# Altium PCB right_conn.PcbDoc
Units mm, origin at the board's own origin, x right, y up, seen from the top; angles counter-clockwise.
Board outline 104.93 x 135.55 mm, 4 copper layers (Top Layer, Mid-Layer 1, Mid-Layer 2, Bottom Layer), stack 1.58 mm thick; 4 components, 59 nets, 180 pads, 120 vias.
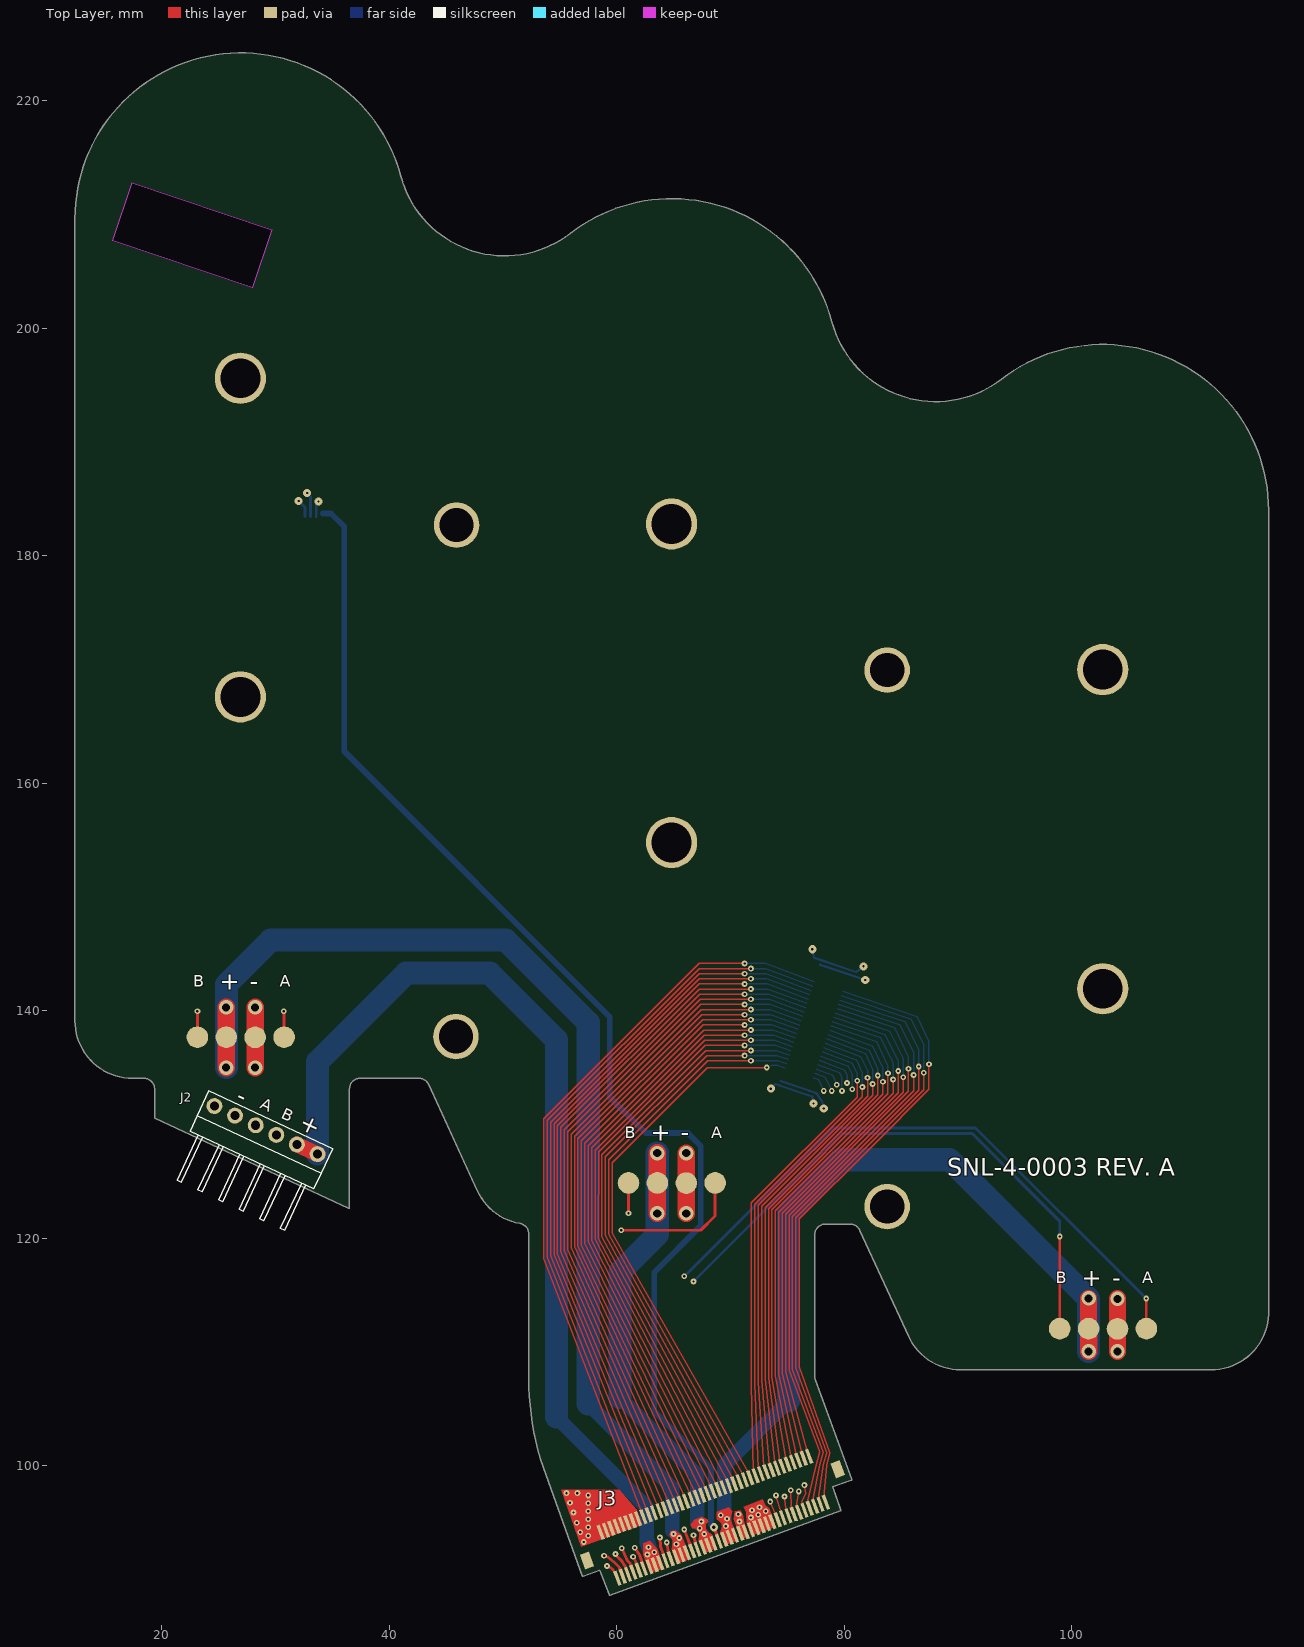
[diagram p0: Top Layer view]
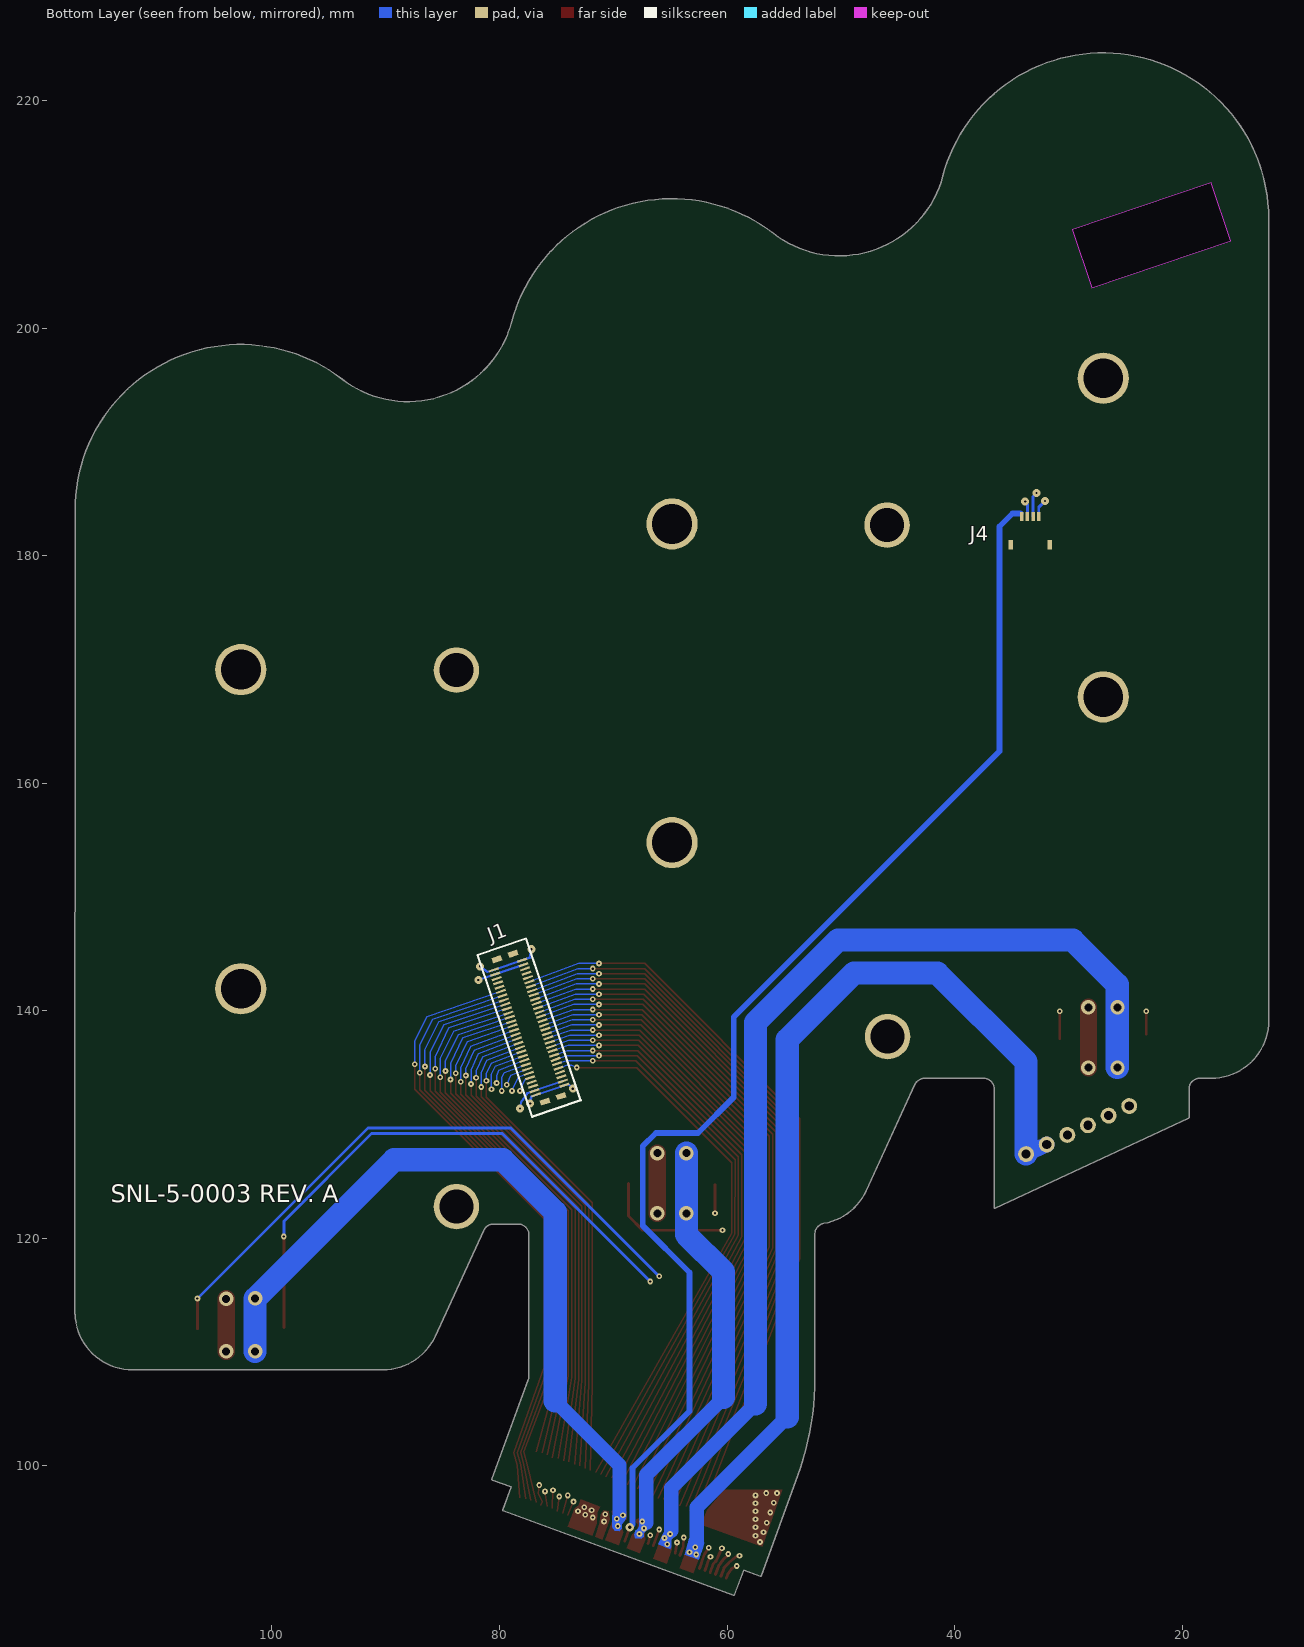
[diagram p1: Bottom Layer view, seen from below]
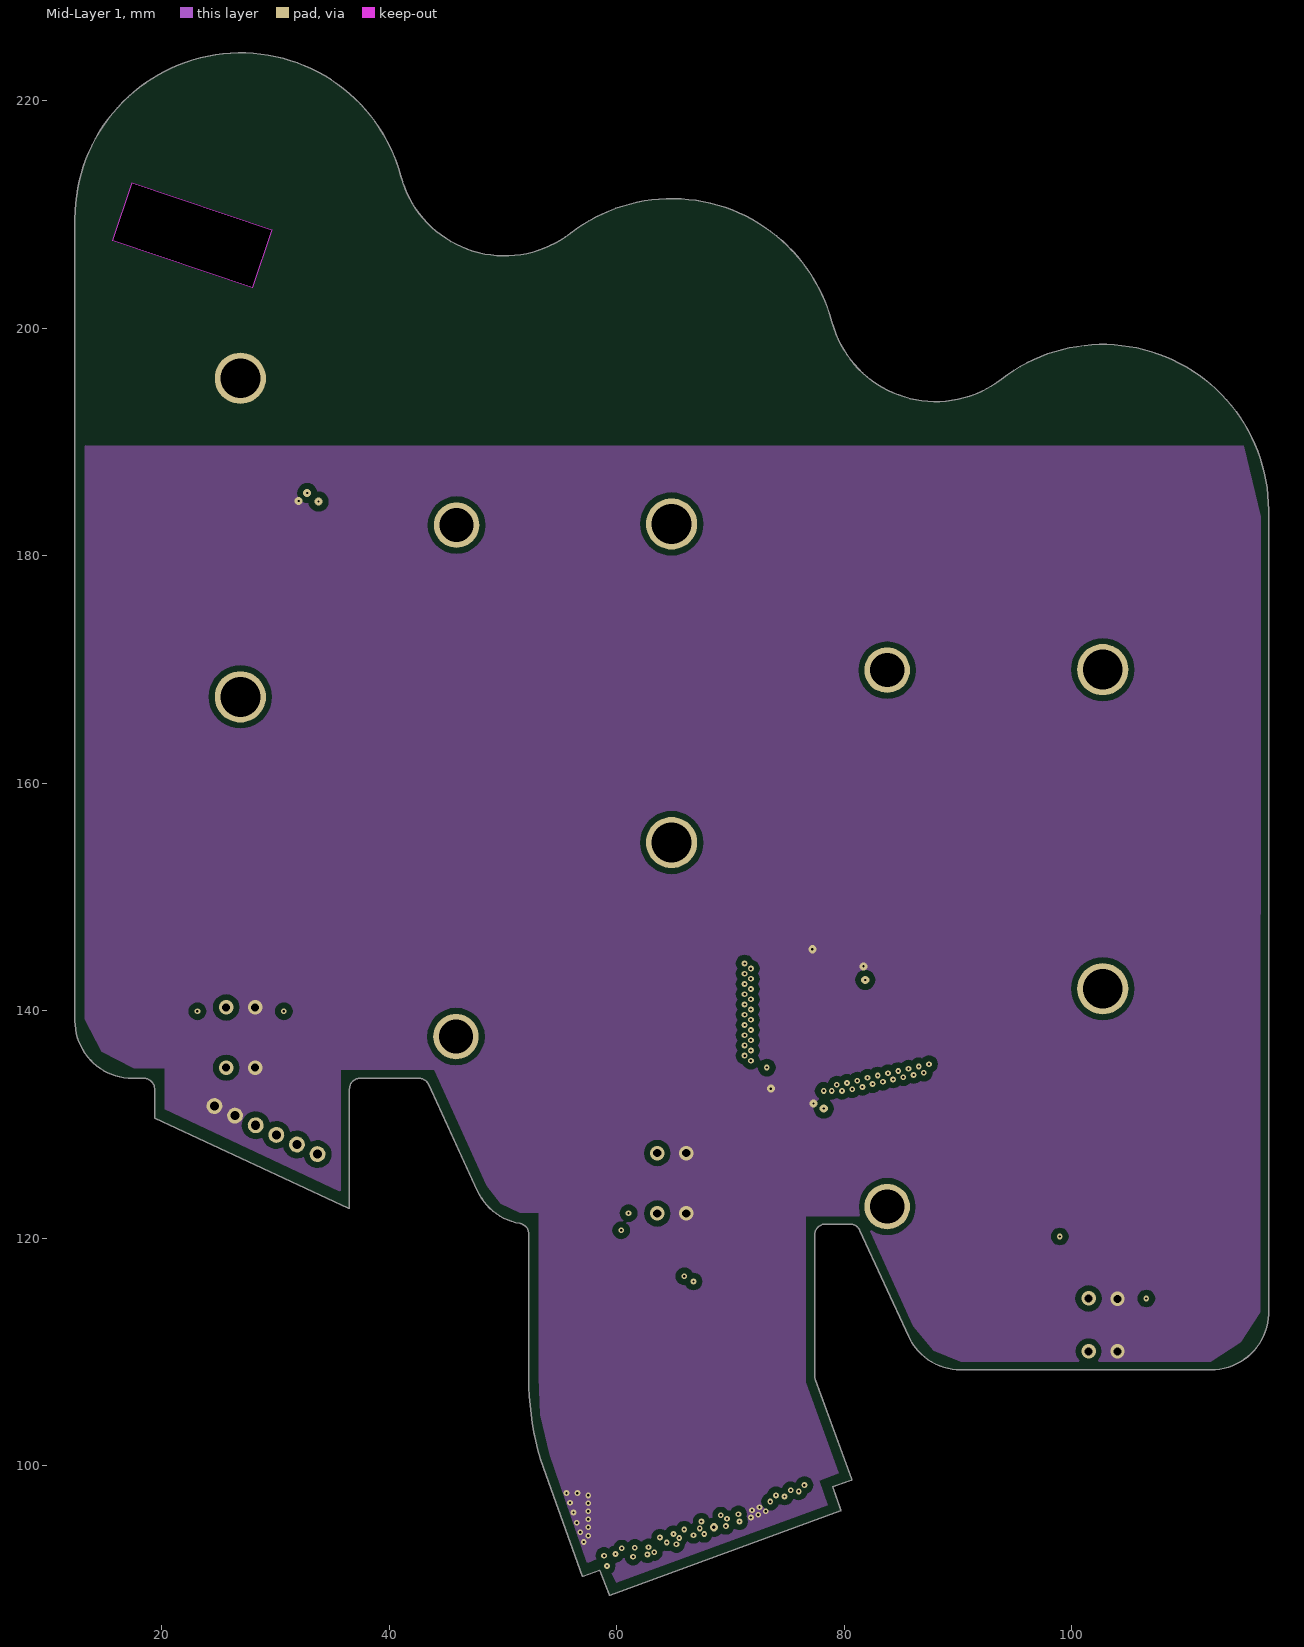
[diagram p2: Mid-Layer 1]
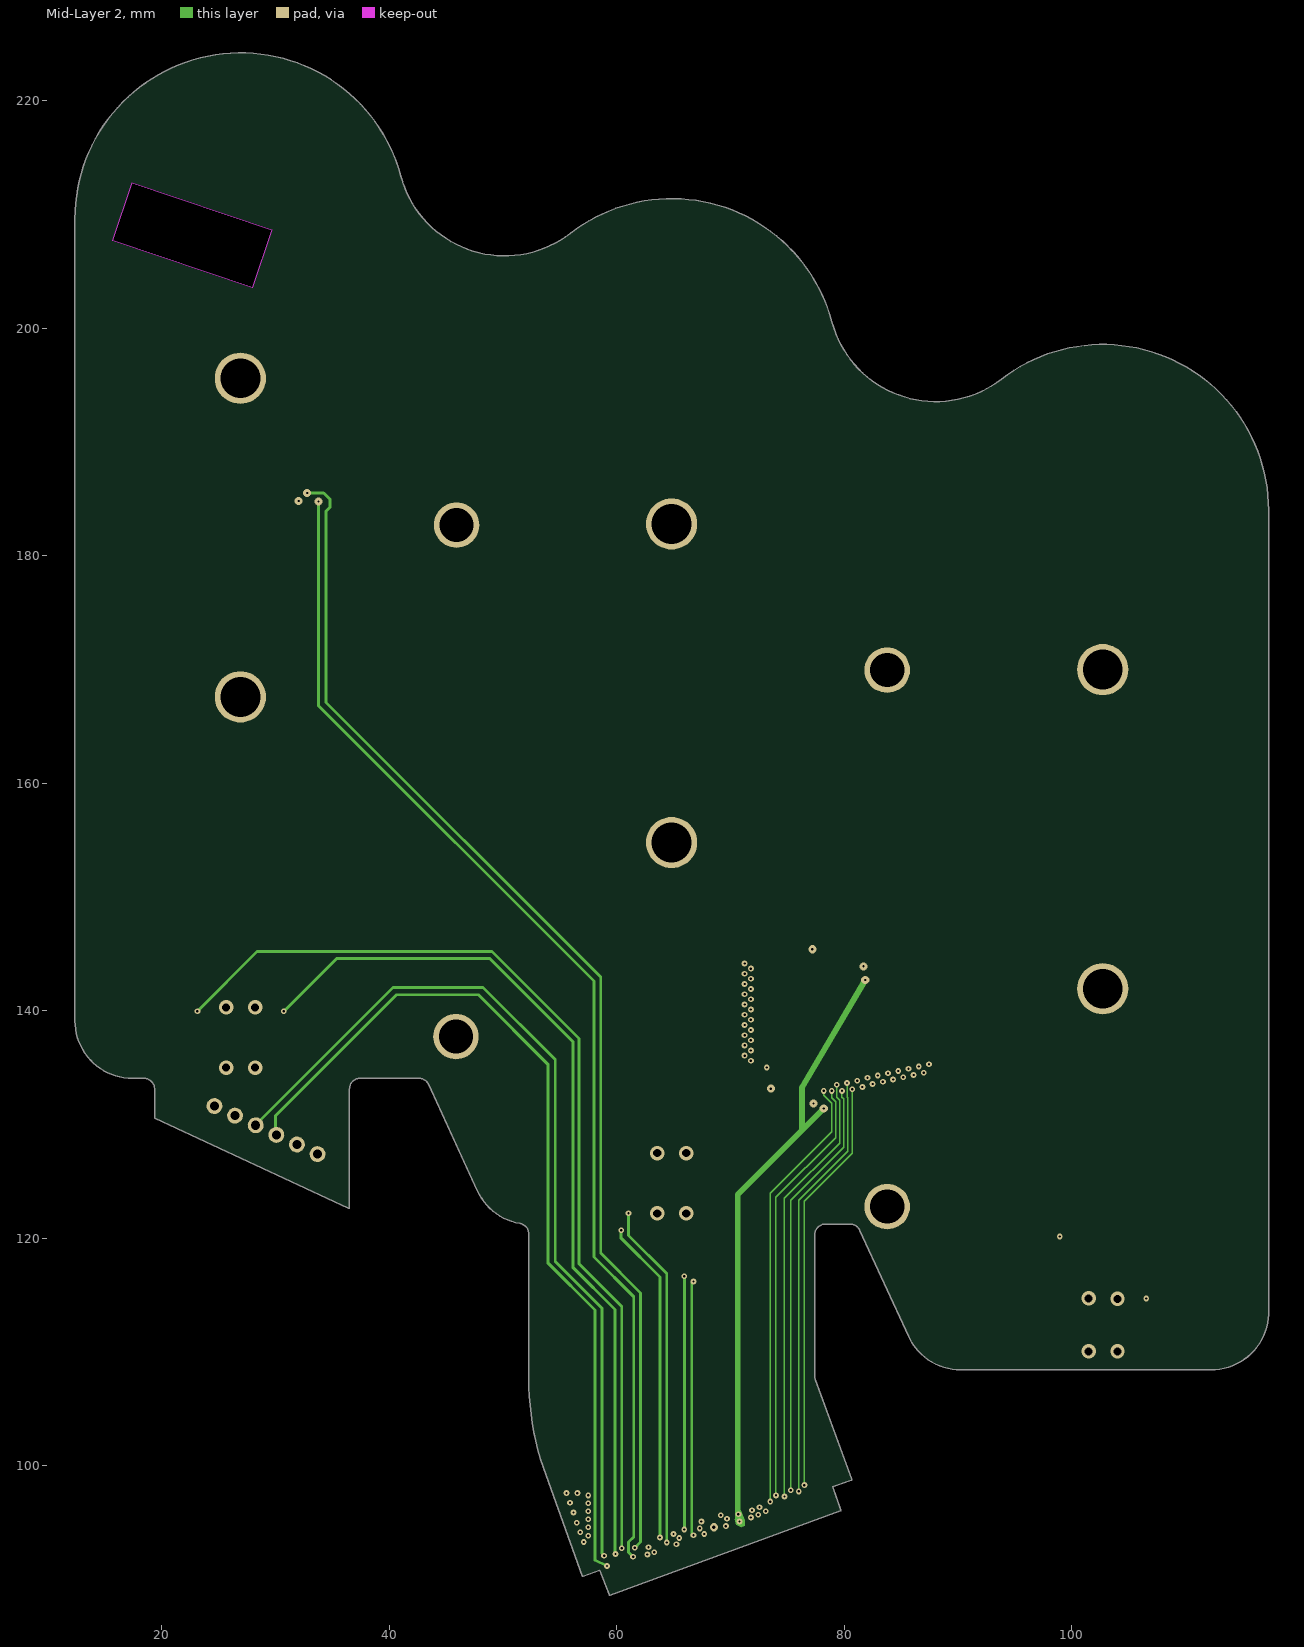
[diagram p3: Mid-Layer 2]

## Layer stack, top to bottom
Top Layer: signal copper 0.0356
Dielectric: prepreg 0.2286, FR-4, Dk 4.8
Mid-Layer 1: signal copper 0.0178
Dielectric: core 1.016, FR-4, Dk 4.8
Mid-Layer 2: signal copper 0.0178
Dielectric: prepreg 0.2286, FR-4, Dk 4.8
Bottom Layer: signal copper 0.0356

## Board outline
19.427,130.562 cw(c19.454,130.62) 19.39,130.62 19.39,133.12 ccw(c18.454,133.12) 18.454,134.056 cw(c18.454,134.12) 18.454,134.056 17.44,134.056 cw(c17.44,134.12) 17.439,134.056 cw(c17.45,139.12) 12.386,139.12 cw(c12.45,139.12) 12.386,139.12 12.39,209.62 cw(c26.954,209.62) 41.03,213.358 ccw(c50.15,215.781) 41.03,213.358 ccw(c50.15,215.781) 55.928,208.321 cw(c64.846,196.807) 78.922,200.546 ccw(c88.042,202.968) 93.82,195.508 ccw(c88.042,202.968) 93.82,195.508 cw(c102.739,183.994) 117.303,183.994 117.314,113.37 cw(c117.25,113.37) 117.314,113.37 cw(c117.25,113.37) 117.301,113.332 cw(c112.24,113.49) 112.24,108.426 90.26,108.426 cw(c90.26,113.49) 85.659,111.374 cw(c85.717,111.401) 85.659,111.374 81.377,120.698 cw(c81.434,120.725) 81.376,120.698 ccw(c80.526,120.307) 81.376,120.698 ccw(c80.526,120.307) 80.526,121.243 78.346,121.243 ccw(c78.346,120.307) 77.41,120.307 77.41,107.892 ccw(c78.346,107.892) 77.467,107.571 80.66,98.822 cw(c80.6,98.8) 80.664,98.8 cw(c80.6,98.8) 80.621,98.74 78.982,98.161 79.71,96.121 cw(c79.65,96.1) 79.714,96.1 cw(c79.65,96.1) 79.672,96.04 59.422,88.64 cw(c59.4,88.7) 59.34,88.677 58.513,90.818 57.072,90.29 cw(c57.05,90.35) 56.99,90.328 53.794,99.143 cw(c77.346,107.715) 52.282,107.715 cw(c77.346,107.715) 52.282,107.715 52.278,120.375 cw(c52.342,120.375) 52.278,120.375 ccw(c51.342,120.375) 51.502,121.298 cw(c52.367,126.287) 47.766,124.171 cw(c47.824,124.198) 47.766,124.172 47.766,124.171 47.766,124.172 43.484,133.51 cw(c43.542,133.537) 43.484,133.511 ccw(c42.634,133.12) 43.484,133.511 cw(c43.542,133.537) 43.484,133.511 ccw(c42.634,133.12) 42.634,134.056 37.454,134.056 ccw(c37.454,133.12) 36.518,133.12 36.518,122.692 cw(c36.454,122.692) 36.427,122.634
cut-out: 27.963,203.555 15.724,207.693 17.438,212.763 29.677,208.624

## Design rules (kind name [scope] priority, off if disabled: settings)
Clearance Clearance_2 [InNamedPolygon('gnd')] p1: gap=0.508
Clearance [All] p2: gap=0.127
HoleSize [All] p1: absolutevalues=TRUE maxlimit=3.81 minlimit=0.025 maxpercent=80.000 minpercent=20.000
MinimumSolderMaskSliver [All] p1: minsoldermaskwidth=0.025
PlaneConnect [All] p1: planeconnectstyle=Direct reliefexpansion=0.508 reliefentries=4 reliefconductorwidth=0.254 reliefairgap=0.254
PolygonConnect [All] p1: connectstyle=Direct reliefconductorwidth=0.254 reliefentries=4 polygonreliefangle="90 Angle" airgapwidth=0.254
RoutingVias [All] p1: holewidth=0.203 width=0.508 viastyle="Through Hole" minholewidth=0.203 minwidth=0.508 maxholewidth=0.711 maxwidth=1.27
SilkToSilkClearance [All] p1: silktosilkclearance=0.025
SilkscreenOverComponentPads [All] p1: minsilkscreentomaskgap=0.025
SolderMaskExpansion [All] p1: expansion=0.102
Width [All] p1: maxlimit=2.54 minlimit=0.127 preferedwidth=0.127
23 further rules are at their usual default settings.

## Classes and differential pairs
component class palm_connector: J4
component class camera_connector: J1
component class thumb_connector: J2
component class mobo_connector: J3

## Components (designator, comment, footprint, x,y, rotation, side; value= is the part's Value field where it differs from the comment)
J1 "Header 30X2" MOLEX_55909_0674_PLUG_60 77.4,138.51 r161.32 bottom locked
J2 "Header 6" 3M_951106_7622_AR 24.65,131.62 r335 top
J3 "header_40x2" JST-80PS-JMDSS-G-1-TF 59.25,92.35 r110 top
J4 "FH19C-4S-0.5SH(05)" FH19C-4S-0.5SH(05) 34.1,183.45 r180 bottom

## Footprints (in the part's own frame and the unit in brackets; to place one, negate y for a bottom-side part, rotate by r counter-clockwise, add the part's x,y. Pads: shape width x height; smd on the part's side, far side on the other; paste and mask are expansions set on the pad)
3M_951106_7622_AR [mm]
  round 1.4 hole 0.8: 1(0,0) 2(2,0) 3(4,0) 4(6,0) 5(8,0) 6(10,0)
  silkscreen extent -1,-7.3 11,1, body extent -1,-7.27 11,0.27, height 2
FH19C-4S-0.5SH(05) [mm]
  rect 0.3x0.8 smd: 1(0,0) 2(0.5,0) 3(1,0) 4(1.5,0)
  rect 0.4x0.8 smd: MNT(-0.95,-2.5) MNT(2.45,-2.5)
  body extent -1.25,-3.3 2.75,0.2, height 0.9
JST-80PS-JMDSS-G-1-TF [mm]
  rect 1.35x0.3 smd: 1(-2.375,0) 2(1.925,0) 3(-2.375,-0.5) 4(1.925,-0.5) 5(-2.375,-1) 6(1.925,-1) 7(-2.375,-1.5) 8(1.925,-1.5) 9(-2.375,-2) 10(1.925,-2) 11(-2.375,-2.5) 12(1.925,-2.5) 13(-2.375,-3) 14(1.925,-3) 15(-2.375,-3.5) 16(1.925,-3.5) 17(-2.375,-4) 18(1.925,-4) 19(-2.375,-4.5) 20(1.925,-4.5) 21(-2.375,-5) 22(1.925,-5) 23(-2.375,-5.5) 24(1.925,-5.5) 25(-2.375,-6) 26(1.925,-6) 27(-2.375,-6.5) 28(1.925,-6.5) 29(-2.375,-7) 30(1.925,-7) 31(-2.375,-7.5) 32(1.925,-7.5) 33(-2.375,-8) 34(1.925,-8) 35(-2.375,-8.5) 36(1.925,-8.5) 37(-2.375,-9) 38(1.925,-9) 39(-2.375,-9.5) 40(1.925,-9.5) 41(-2.375,-10) 42(1.925,-10) 43(-2.375,-10.5) 44(1.925,-10.5) 45(-2.375,-11) 46(1.925,-11) 47(-2.375,-11.5) 48(1.925,-11.5) 49(-2.375,-12) 50(1.925,-12) 51(-2.375,-12.5) 52(1.925,-12.5) 53(-2.375,-13) 54(1.925,-13) 55(-2.375,-13.5) 56(1.925,-13.5) 57(-2.375,-14) 58(1.925,-14) 59(-2.375,-14.5) 60(1.925,-14.5) 61(-2.375,-15) 62(1.925,-15) 63(-2.375,-15.5) 64(1.925,-15.5) 65(-2.375,-16) 66(1.925,-16) 67(-2.375,-16.5) 68(1.925,-16.5) 69(-2.375,-17) 70(1.925,-17) 71(-2.375,-17.5) 72(1.925,-17.5) 73(-2.375,-18) 74(1.925,-18) 75(-2.375,-18.5) 76(1.925,-18.5) 77(-2.375,-19) 78(1.925,-19) 79(-2.375,-19.5) 80(1.925,-19.5)
  rect 1.4x0.85 smd: MNT(0,-21.475) MNT(0,1.975)
  body extent -2.8,-21.8 2.35,2.3, height 4.79
MOLEX_55909_0674_PLUG_60 [mm]
  rect 0.9x0.22 smd: 1(-1.315,5.8) 2(1.315,5.8) 3(-1.315,5.4) 4(1.315,5.4) 5(-1.315,5) 6(1.315,5) 7(-1.315,4.6) 8(1.315,4.6) 9(-1.315,4.2) 10(1.315,4.2) 11(-1.315,3.8) 12(1.315,3.8) 13(-1.315,3.4) 14(1.315,3.4) 15(-1.315,3) 16(1.315,3) 17(-1.315,2.6) 18(1.315,2.6) 19(-1.315,2.2) 20(1.315,2.2) 21(-1.315,1.8) 22(1.315,1.8) 23(-1.315,1.4) 24(1.315,1.4) 25(-1.315,1) 26(1.315,1) 27(-1.315,0.6) 28(1.315,0.6) 29(-1.315,0.2) 30(1.315,0.2) 31(-1.315,-0.2) 32(1.315,-0.2) 33(-1.315,-0.6) 34(1.315,-0.6) 35(-1.315,-1) 36(1.315,-1) 37(-1.315,-1.4) 38(1.315,-1.4) 39(-1.315,-1.8) 40(1.315,-1.8) 41(-1.315,-2.2) 42(1.315,-2.2) 43(-1.315,-2.6) 44(1.315,-2.6) 45(-1.315,-3) 46(1.315,-3) 47(-1.315,-3.4) 48(1.315,-3.4) 49(-1.315,-3.8) 50(1.315,-3.8) 51(-1.315,-4.2) 52(1.315,-4.2) 53(-1.315,-4.6) 54(1.315,-4.6) 55(-1.315,-5) 56(1.315,-5) 57(-1.315,-5.4) 58(1.315,-5.4) 59(-1.315,-5.8) 60(1.315,-5.8)
  rect 0.85x0.5 smd: MNT(-0.75,6.6) MNT(-0.75,-6.6) MNT(0.75,-6.6) MNT(0.75,6.6)
  silkscreen extent -2.25,-7.5 2.25,7.5, body extent -1.56,-7 1.57,7, height 1.17

## Part data
J1: "Header, 30-Pin, Dual row"
J2: "Header, 6-Pin"
J4: library part "Header 4", "Header, 4-Pin"

## Free pads (board coordinates)
  round 1.9 smd paste-10: F0_A(30.77,137.67) F0_B(23.15,137.67) F0_POWER(25.69,137.67) F1_A(68.66,124.86) F1_B(61.04,124.86) F1_POWER(63.58,124.86) F2_A(106.56,112.05) F2_B(98.94,112.05) F2_POWER(101.48,112.05) GND(28.23,137.66) GND(66.12,124.85) GND(104.02,112.04)
  round 4.5 hole 3.5: MNT(26.93,167.58) MNT(26.93,195.58) MNT(64.83,154.78) MNT(64.83,182.78) MNT(102.73,141.93) MNT(102.73,169.98)
  round 4 hole 3: MNT(45.88,137.73) MNT(45.93,182.68) MNT(83.78,122.78) MNT(83.78,169.93)

## Via types
v1: diameter 0.508, hole 0.203, Top Layer to Bottom Layer, tented both sides, 98 vias
v2: diameter 1.27, hole 0.711, Top Layer to Bottom Layer, tented both sides, 12 vias
v3: diameter 0.711, hole 0.203, Top Layer to Bottom Layer, tented both sides, 9 vias
v4: diameter 0.711, hole 0.305, Top Layer to Bottom Layer, tented both sides, 1 vias

## Nets (pads, with @x,y where several pads share a name; then routed paths per layer and width w, separated by ;. In a path a pad name is that pad's centre, name@x,y a point inside that pad or via, vN(x,y) a via of type N, cw(c..) or ccw(c..) an arc to the next point about the centre after c; other vN are vias at no path point)
9V: J3.39 J4.1 | length 110.6
  Top Layer w0.254: v4(68.55,94.6) J3.39
  Bottom Layer w0.508: J4.1@34.2,183.7 34.9,183.7 36.05,182.55 36.05,162.8 59.4,139.45 59.4,132.4 62.55,129.25 66.25,129.25 67.4,128.1 67.4,121.1 63.3,117 63.3,104.8 68.3,99.8 68.3,94.85 v4(68.55,94.6)
CAM_D0_0: J1.18 J3.24 | length 63.4
  Top Layer w0.127: J3.24@63.6,96.45 54.5,118.55 54.5,130.05 67.25,142.8 v1(71.8,142.8)
  Bottom Layer w0.127: v1(71.8,142.8) 73.2,142.8 J1.18
CAM_D0_1: J1.15 J3.75 | length 53.6
  Top Layer w0.127: J3.75@77.25,96.95 77.85,100.1 78.15,101.2 75.45,108.5 75.45,121.9 82.3,128.75 86.55,133 v1(86.55,135.1)
  Bottom Layer w0.127: J1.15 85.35,139.05 86.55,136.55 v1(86.55,135.1)
CAM_D1_0: J1.22 J3.28 | length 61.7
  Top Layer w0.127: J3.28@64.55,96.85 55.1,118.8 55.1,129.75 67.25,141.9 v1(71.8,141.9)
  Bottom Layer w0.127: v1(71.8,141.9) 73.3,141.9 J1.22
CAM_D1_1: J1.23 J3.76 | length 46.5
  Top Layer w0.127: J3.76@75.8,100.95 74.25,108.05 74.25,122.3 84.75,132.8 v1(84.75,134.7)
  Bottom Layer w0.127: J1.23 83.6,137.9 84.75,135.55 v1(84.75,134.7)
CAM_D2_0: J1.16 J3.22 | length 64.5
  Top Layer w0.127: J3.22@63.25,96.05 54.2,118.45 54.2,130.2 67.25,143.25 v1(71.25,143.25)
  Bottom Layer w0.127: v1(71.25,143.25) 73.15,143.25 J1.16
CAM_D2_1: J1.17 J3.73 | length 53.1
  Top Layer w0.127: J3.73@76.75,96.8 77.55,100.1 77.85,101.25 75.15,108.4 75.15,122 86.1,132.95 v1(86.1,134.35)
  Bottom Layer w0.127: J1.17 84.878,138.773 86.1,136.35 v1(86.1,134.35)
CAM_D3_0: J1.14 J3.20 | length 65.4
  Top Layer w0.127: J3.20@62.8,95.8 53.9,118.35 53.9,130.35 67.25,143.7 v1(71.8,143.7)
  Bottom Layer w0.127: v1(71.8,143.7) 73.1,143.7 J1.14
CAM_D3_1: J1.19 J3.80 | length 47.5
  Top Layer w0.127: J3.80@76.75,101.25 74.85,108.25 74.85,122.1 85.65,132.9 v1(85.65,134.9)
  Bottom Layer w0.127: J1.19@79.45,140.15 84.45,138.5 85.65,135.95 v1(85.65,134.9)
CAM_D4_0: J1.28 J3.34 | length 59.4
  Top Layer w0.127: J3.34@66.05,97.15 56,119.15 56,129.15 67.4,140.55 v1(71.25,140.55)
  Bottom Layer w0.127: v1(71.25,140.55) 73.45,140.55 J1.28
CAM_D4_1: J1.21 J3.78 | length 47
  Top Layer w0.127: J3.78@76.25,101.15 74.55,108.15 74.55,122.2 85.2,132.85 v1(85.2,134.15)
  Bottom Layer w0.127: J1.21 84.004,138.196 85.2,135.8 v1(85.2,134.15)
CAM_D5_0: J1.24 J3.30 | length 61
  Top Layer w0.127: J3.30@65.05,96.95 55.4,118.9 55.4,129.55 67.3,141.45 v1(71.25,141.45)
  Bottom Layer w0.127: v1(71.25,141.45) 73.35,141.45 J1.24
CAM_D5_1: J1.43 J3.69 | length 42.7
  Top Layer w0.127: J3.69@75.8,96.45 v1(76,97.75)
  Mid-Layer 2 w0.127: v1(76,97.75) 76,123.35 80.3,127.65 80.3,132.35 80.25,132.4 v1(80.25,133.65)
  Bottom Layer w0.127: J1.43 80.046,134.761 80.25,134.3 v1(80.25,133.65) v1@80.25,133.5
CAM_D6_0: J1.38 J3.44 | length 55.1
  Top Layer w0.127: J3.44@68.3,98.15 57.5,119.7 57.5,128.15 67.65,138.3 v1(71.8,138.3)
  Bottom Layer w0.127: v1(71.8,138.3) 73.75,138.3 J1.38
CAM_D6_1: J1.45 J3.67 | length 42.4
  Top Layer w0.127: v1(75.3,97.85) J3.67@75.35,96.25
  Mid-Layer 2 w0.127: v1(75.3,97.85) 75.3,123.35 79.95,128 79.95,132.25 79.8,132.4 v1(79.8,132.95)
  Bottom Layer w0.127: J1.45 79.6,134.55 79.8,134.15 v1@79.797,132.953
CAM_D7_0: J1.40 J3.46 | length 54.2
  Top Layer w0.127: J3.46@68.75,98.35 57.8,119.8 57.8,127.95 67.7,137.85 v1(71.25,137.85)
  Bottom Layer w0.127: v1(71.25,137.85) 73.8,137.85 J1.40
CAM_D7_1: J1.51 J3.61 | length 41.5
  Top Layer w0.127: v1(73.5,96.85) J3.61@74,95.65
  Mid-Layer 2 w0.127: v1(73.5,96.85) 73.5,123.95 78.9,129.35 78.9,131.85 78.2,132.55 v1(78.2,132.95)
  Bottom Layer w0.127: J1.51 77.761,133.933 v1(78.2,132.95)
CAM_D8_0: J1.44 J3.50 | length 52.6
  Top Layer w0.127: J3.50@69.7,98.7 58.4,120 58.42,127.608 67.806,136.956 v1(71.25,136.95)
  Bottom Layer w0.127: v1(71.25,136.95) 73.95,136.95 J1.44
CAM_D8_1: J1.47 J3.65 | length 42.1
  Top Layer w0.127: v1(74.75,97.3) J3.65@74.9,96
  Mid-Layer 2 w0.127: v1(74.75,97.3) 74.75,123.5 79.6,128.35 79.6,132.15 79.35,132.4 v1(79.35,133.5)
  Bottom Layer w0.127: J1.47 78.994,134.315 v1(79.35,133.5)
CAM_D9_0: J1.46 J3.52 | length 51.6
  Top Layer w0.127: J3.52@70.15,98.95 58.7,120.15 58.7,127.35 67.85,136.5 v1(71.8,136.5)
  Bottom Layer w0.127: v1(71.8,136.5) 74.05,136.5 J1.46
CAM_D9_1: J1.49 J3.63 | length 41.8
  Top Layer w0.127: v1(74,97.4) J3.63@74.45,95.85
  Mid-Layer 2 w0.127: v1(74,97.4) 74,123.6 79.25,128.85 79.25,132 78.9,132.35 v1(78.9,132.95)
  Bottom Layer w0.127: J1.49 78.35,134.15 v1(78.9,132.95)
CAM_EN_0: J1.12 J3.18 | length 66
  Top Layer w0.127: J3.18@62.25,95.8 53.6,118.2 53.6,130.5 67.25,144.15 v1(71.25,144.15)
  Bottom Layer w0.127: v1(71.25,144.15) 73.05,144.15 J1.12
CAM_EN_1: J1.11 J3.79 | length 54.6
  Top Layer w0.127: J3.79@78.2,97.2 78.45,100.05 78.75,101.15 76.05,108.7 76.05,121.7 82.5,128.15 87.45,133.1 v1(87.45,135.3)
  Bottom Layer w0.127: J1.11 86.4,139.446 87.45,137.3 v1(87.45,135.3)
CAM_EXPOSURE_0: J1.52 J3.58 | length 49.1
  Top Layer w0.127: J3.58@71.55,99.45 59.597,120.45 59.597,126.647 67.95,135 v1(73.2,135)
  Bottom Layer w0.127: v1(73.2,135) 73.65,135.2 74.1,135.2 J1.52
CAM_EXPOSURE_1: J1.39 J3.60 | length 42.6
  Top Layer w0.127: J3.60@72,99.6 71.85,107.15 71.85,123.1 81.15,132.4 v1(81.15,133.85)
  Bottom Layer w0.127: J1.39 80.715,135.4 81.15,134.45 v1(81.15,133.85)
CAM_FRAME_VALID_0: J1.42 J3.48 | length 53.4
  Top Layer w0.127: J3.48@69.25,98.5 58.1,119.9 58.1,127.75 67.75,137.4 v1(71.8,137.4)
  Bottom Layer w0.127: v1(71.8,137.4) 73.9,137.4 J1.42
CAM_FRAME_VALID_1: J1.25 J3.74 | length 46.1
  Top Layer w0.127: J3.74@75.35,100.7 73.95,107.9 73.95,122.4 84.3,132.75 v1(84.3,133.95)
  Bottom Layer w0.127: J1.25 83.209,137.603 84.3,135.4 v1(84.3,133.95)
CAM_LINE_VALID_0: J1.48 J3.54 | length 50.9
  Top Layer w0.127: J3.54@70.65,99.05 59,120.25 59,127.15 67.9,136.05 v1(71.25,136.05)
  Bottom Layer w0.127: v1(71.25,136.05) 74.1,136.05 J1.48
CAM_LINE_VALID_1: J1.41 J3.71 | length 43.2
  Top Layer w0.127: J3.71@76.35,96.55 76.25,96.85 76.6,97.6 v1(76.5,98.3)
  Mid-Layer 2 w0.127: v1(76.5,98.3) 76.5,123.25 80.7,127.45 v1(80.7,133.1)
  Bottom Layer w0.127: J1.41 80.36,135.128 80.7,134.4 v1@80.7,132.95
CAM_PCLK_0: J1.32 J3.38 | length 57.6
  Top Layer w0.127: J3.38@66.9,97.65 56.6,119.35 56.6,128.75 67.5,139.65 v1(71.25,139.65)
  Bottom Layer w0.127: v1(71.25,139.65) 73.55,139.65 J1.32
CAM_PCLK_1: J1.29 J3.70 | length 44.9
  Top Layer w0.127: J3.70@74.35,100.45 73.35,107.7 73.35,122.6 83.4,132.65 v1(83.4,133.75)
  Bottom Layer w0.127: J1.29 82.516,136.894 83.4,135 v1(83.4,133.75)
CAM_PWR: J1.3 J1.4 J1.57 J1.58 J3.47 J3.49 | length 62.9
  Mid-Layer 2 w0.508: 70.65,95.35 70.65,123.85 76.3,129.5 ; v3(78.2,131.4) 76.3,129.5 ; v3(81.85,142.7) 76.3,133.25 76.3,129.5
  Bottom Layer w0.203: J1.58 J1.57 77.55,132.75 78.1,131.95 v3(78.2,131.4) ; J1.4 J1.3 v3(81.85,142.7)
  other v1: 70.8,95.1 70.7,95.75
CAM_RESET_0: J1.26 J3.32 | length 60.2
  Top Layer w0.127: J3.32@65.55,97.05 55.7,119 55.7,129.35 67.35,141 v1(71.8,141)
  Bottom Layer w0.127: v1(71.8,141) 73.4,141 J1.26
CAM_RESET_1: J1.35 J3.64 | length 43.4
  Top Layer w0.127: J3.64@72.95,100 72.45,107.35 72.45,122.9 82.05,132.5 v1(82.05,134.1)
  Bottom Layer w0.127: J1.35 81.471,135.969 82.05,134.7 v1(82.05,134.1)
CAM_SCL: J1.31 J3.68 | length 44.3
  Top Layer w0.127: J3.68@73.9,100.35 73.05,107.6 73.05,122.7 82.95,132.6 v1(82.95,134.3)
  Bottom Layer w0.127: J1.31 82.202,136.544 82.95,134.9 v1@82.95,134.35
CAM_SDA: J1.30 J3.36 | length 58.5
  Top Layer w0.127: J3.36@66.5,97.4 56.3,119.25 56.3,128.95 67.45,140.1 v1(71.8,140.1)
  Bottom Layer w0.127: v1(71.8,140.1) 73.5,140.1 J1.30
CAM_STFRM_0: J1.36 J3.42 | length 55.9
  Top Layer w0.127: J3.42@67.85,98 57.2,119.55 57.2,128.35 67.6,138.75 v1(71.25,138.75)
  Bottom Layer w0.127: v1(71.25,138.75) 73.65,138.75 J1.36
CAM_STFRM_1: J1.33 J3.66 | length 43.9
  Top Layer w0.127: J3.66@73.4,100.15 72.75,107.5 72.75,122.8 82.5,132.55 v1(82.5,133.55)
  Bottom Layer w0.127: J1.33 81.874,136.207 82.5,134.8 v1(82.5,133.55)
CAM_STLN_0: J1.50 J3.56 | length 50
  Top Layer w0.127: J3.56@71.1,99.25 59.3,120.35 59.297,126.897 68,135.6 v1(71.8,135.6)
  Bottom Layer w0.127: v1(71.8,135.6) 74.15,135.6 J1.50
CAM_STLN_1: J1.27 J3.72 | length 45.4
  Top Layer w0.127: J3.72@74.85,100.65 73.65,107.8 73.65,122.5 83.85,132.7 v1(83.85,134.5)
  Bottom Layer w0.127: J1.27 82.842,137.25 83.85,135.15 v1(83.85,134.5)
CAM_STROBE_0: J1.34 J3.40 | length 56.7
  Top Layer w0.127: J3.40@67.4,97.85 56.9,119.45 56.9,128.55 67.55,139.2 v1(71.8,139.2)
  Bottom Layer w0.127: v1(71.8,139.2) 73.6,139.2 J1.34
CAM_STROBE_1: J1.37 J3.62 | length 43
  Top Layer w0.127: J3.62@72.45,99.8 72.15,107.25 72.15,123 81.6,132.45 v1(81.6,133.3)
  Bottom Layer w0.127: J1.37 81.107,135.652 81.6,134.55 v1(81.6,133.3)
CAM_SYSCLK_0: J1.20 J3.26 | length 62.7
  Top Layer w0.127: J3.26@64.15,96.5 54.8,118.65 54.8,129.9 67.25,142.35 v1(71.25,142.35)
  Bottom Layer w0.127: v1(71.25,142.35) 73.25,142.35 J1.20
CAM_SYSCLK_1: J1.13 J3.77 | length 54.1
  Top Layer w0.127: J3.77@77.7,97.1 78.15,100.1 78.45,101.15 75.75,108.6 75.75,121.8 87,133.05 v1(87,134.55)
  Bottom Layer w0.127: J1.13 85.882,139.247 87,137 v1(87,134.55)
F0_A: J3.5 pad.F0_A | length 81.7
  Top Layer w0.254: pad.F0_A@30.75,137.55 v1(30.75,139.95) ; v1(59.9,92.25) 59.85,92.2 60.35,91.75 60.75,91.15 J3.5
  Mid-Layer 2 w0.254: v1(30.75,139.95) 35.4,144.6 48.85,144.6 56.15,137.3 56.15,117.45 59.85,113.75 59.85,92.2 v1(59.9,92.25)
F0_B: J3.7 pad.F0_B | length 89.6
  Top Layer w0.254: pad.F0_B@23.15,137.95 v1(23.15,139.95) ; v1(60.45,92.75) 60.7,92.2 60.95,91.65 61.2,91.4 J3.7
  Mid-Layer 2 w0.254: v1(23.15,139.95) 28.4,145.2 49.05,145.2 56.7,137.55 56.7,117.75 60.45,114 v1(60.45,92.75)
F0_POWER: J3.23 J3.25 J3.27 pad.F0_POWER | length 96.7
  Top Layer w1.524: v2(25.68,134.99) v2(25.68,140.29)
  Bottom Layer w1.27: 57.5,105.45 64.9,98.05 64.9,94.3
  Bottom Layer w2.032: v2@25.7,135 25.7,142.3 29.6,146.2 50.25,146.2 57.5,138.95 57.5,105.45
  other v1: 65.25,93.1 65.5,93.65 65,94
F1_A: J3.19 pad.F1_A | length 41.7
  Top Layer w0.254: v1(60.4,120.7) 67.4,120.7 68.65,121.95 pad.F1_A@68.65,124.8 ; v1(63.8,93.7) 63.85,92.9 J3.19@64.135,92.127
  Mid-Layer 2 w0.254: v1(60.4,120.7) 60.4,120 63.8,116.6 63.8,93.75 v1@63.85,93.7
F1_B: J3.21 pad.F1_B | length 33.7
  Top Layer w0.254: v1(61.05,122.2) pad.F1_B@61.05,124.7 ; v1(64.4,93.25) J3.21@64.552,92.351
  Mid-Layer 2 w0.254: v1(61.05,122.2) 61.05,120.25 64.4,116.9 64.4,93.4 v1@64.5,93.3
F1_POWER: J3.33 J3.35 J3.37 pad.F1_POWER | length 42
  Top Layer w1.524: v2(63.57,122.18) v2@63.57,127.51
  Bottom Layer w1.27: 60.3,106 67.1,99.2 67.1,95
  Bottom Layer w2.032: 60.3,106 60.3,117.05 63.57,120.32 v2(63.57,122.18) v2(63.57,127.48)
  other v1: 67.7,94 67.3,94.5 67.45,95.1
F2_A: J3.29 pad.F2_A | length 78.6
  Top Layer w0.254: v1(65.95,94.4) J3.29@66.484,92.982 ; pad.F2_A@106.55,112.05 v1(106.55,114.7)
  Mid-Layer 2 w0.254: v1(65.95,94.4) v1(65.95,116.65)
  Bottom Layer w0.254: v1(65.95,116.65) 79,129.7 91.55,129.7 v1(106.55,114.7)
F2_B: J3.31 pad.F2_B | length 73.3
  Top Layer w0.254: v1(66.75,93.9) J3.31@66.929,93.179 ; pad.F2_B@98.95,112.15 v1(98.95,120.15)
  Mid-Layer 2 w0.254: v1@66.675,93.825 66.6,93.9 66.6,116.05 v1(66.75,116.2)
  Bottom Layer w0.254: v1(66.75,116.2) 79.75,129.2 91.25,129.2 98.95,121.5 v1(98.95,120.15)
F2_POWER: J3.41 J3.43 J3.45 pad.F2_POWER | length 71.7
  Top Layer w1.524: pad.F2_POWER@101.47,112.03 v2@101.47,114.71 ; v2(101.48,110.06) pad.F2_POWER
  Bottom Layer w1.27: 69.45,95.6 69.45,100.05 75.1,105.7
  Bottom Layer w2.032: 75.1,105.7 75.1,122.3 79.7,126.9 89.26,126.9 101.48,114.68 v2(101.48,110.06)
  other v1: 69.6,94.7 69.7,95.35 69.15,95.65
  other v2: 101.48,114.71
F3_A: J2.3 J3.3 | length 81.8
  Top Layer w0.254: v1(58.9,92.1) 59.2,92 59.85,91.45 60.25,91.05 J3.3
  Mid-Layer 2 w0.254: J2.3@28.3,130 40.35,142.05 48.25,142.05 54.6,135.7 54.6,117.95 58.7,113.85 58.7,92.3 v1(58.9,92.1)
F3_B: J2.4 J3.1 | length 80.5
  Top Layer w0.254: v1(59.15,91.2) 59.6,90.95 59.9,90.55 J3.1
  Mid-Layer 2 w0.254: J2.4@30,129.05 30,130.75 40.65,141.4 47.85,141.4 53.95,135.3 53.95,117.85 58.1,113.7 58.1,91.7 v1(59.15,91.2)
F3_POWER: J2.5 J2.6 J3.13 J3.15 J3.17 | length 86.2
  Top Layer w1.397: J2.5 J2.6
  Bottom Layer w1.27: 54.7,104.3 62.65,96.35 62.65,93.3
  Bottom Layer w1.397: J2.5 J2.6
  Bottom Layer w2.032: J2.6 33.713,135.513 41.5,143.3 48.85,143.3 54.7,137.45 54.7,104.3
  other v1: 62.7,92.2 63.3,92.4 62.8,92.85
GND: J1.1 J1.2 J1.59 J1.60 J2.1 J2.2 J3.2 J3.4 J3.6 J3.8 J3.10 J3.12 J3.14 J3.16 J3.51 J3.53 J3.55 J3.57 J3.59 J4.4 pad.GND | length 26.9
  Top Layer w1.524: v2(28.23,134.99) 28.23,137.66 v2(28.23,140.29) ; v2(66.12,122.18) 66.12,124.85 v2(66.12,127.48) ; v2(104.02,110.05) 104.02,112.04 v2(104.02,114.67)
  Bottom Layer w0.203: v3(73.55,133.15) 73.95,133.55 J1.60 J1.59 77.2,132.45 v3(77.3,131.85) ; v3(77.2,145.4) 77.35,144.65 J1.2 J1.1 81.05,143.4 v3(81.7,143.9)
  Bottom Layer w0.254: v3(32.05,184.8) 32.6,184.25 J4.4
  other v1: 57.1,93.3 57.5,93.85 56.8,94.15 57.5,94.6 56.5,95 57.5,95.3 71.8,95.45 72.45,95.7 56.2,95.9 57.5,96 73.1,96 71.9,96.1 72.55,96.35 57.5,96.7 55.9,96.75 57.5,97.4 55.6,97.6 56.55,97.6
PALM_A: J3.9 J4.2 | length 107.5
  Top Layer w0.254: v1(61.45,92) 61.55,91.9 J3.9
  Mid-Layer 2 w0.254: v3@33.6,184.75 v3(33.8,184.75) 33.8,166.8 58,142.6 58,118.35 61.5,114.85 61.5,93.75 61.05,93.3 61.05,92.4 v1(61.45,92)
  Bottom Layer w0.254: J4.2 33.6,184.55 v3(33.8,184.75)
PALM_B: J3.11 J4.3 | length 110.4
  Top Layer w0.254: v1(61.6,92.8) 62,92.2 J3.11
  Mid-Layer 2 w0.254: v3(32.8,185.5) 34.25,185.5 34.8,184.95 34.8,184.25 34.45,183.9 34.45,167.1 58.6,142.95 58.6,118.7 62.1,115.2 62.1,93.3 v1(61.6,92.8)
  Bottom Layer w0.254: v3(32.8,185.5) 33.1,185.2 J4.3
pads on no net: J1.5 J1.6 J1.7 J1.8 J1.9 J1.10 J1.53 J1.54 J1.55 J1.56 J1.MNT J3.MNT J4.MNT

## Polygon pours and split planes (outlines as drawn)
GND on Mid-Layer 1 "gnd" (solid, remove dead copper, pour order 4): 13.25,189.7 115.1,189.65 116.6,183.4 116.55,113.5 114.85,110.85 112.2,109.15 90.25,109.15 87.85,110.1 86.05,112.25 81.676,121.93 76.6,121.95 76.6,107.35 79.5,99.35 77.8,98.7 78.55,96.55 59.95,89.7 58.95,92.1 57.4,91.45 54.1,100.95 53.3,104.5 53.15,107.8 53.15,122.25 51.5,122.25 49.8,123.05 48.6,124.6 43.97,134.82 35.74,134.82 35.74,124.07 20.27,131.33 20.27,134.95 17.55,134.95 14.75,136.4 13.25,139.25

## Other copper
Top Layer:
  region net GND: 62.25,94.8 61.75,96.15 60.25,97.9 55.15,97.9 56.9,92.9
  region net GND: 71.85,93.85 74,94.65 73.4,96.25 73.05,96.55 72.85,97.05 71.15,96.4 71.4,95.9 71.45,94.95
  region net F2_POWER: 69.5,93 70.7,93.45 70,95.35 70.15,96 69.85,96.35 68.8,95.95 68.8,95.3 69.15,95.05 69.3,94.7 69.1,94.15
  region net CAM_PWR: 70.95,93.5 71.6,93.75 71.2,95 71.1,95.75 70.85,96.1 70.4,96 70.3,95.3
  region net F1_POWER: 67.65,92.3 67.2,93.5 67.25,93.9 67.25,94.15 66.95,94.45 66.65,94.5 66.5,94.8 66.8,95.25 67.5,95.5 67.95,95.3 68.05,95.1 67.85,94.85 67.85,94.5 67.95,94.25 68.35,94 68.8,92.75
  region net F0_POWER: 65.3,91.4 64.85,92.65 64.95,93.25 64.95,93.45 64.65,93.85 64.7,94.25 65.15,94.35 65.7,93.95 66.5,91.85
  region net F3_POWER: 62.95,90.55 62.35,92.2 62.35,93.2 62.9,93.4 63.55,92.7 64.15,91
Mid-Layer 2:
  region net CAM_PWR: 70.4,95.3 70.5,94.8 70.95,94.6 71.25,94.75 71.25,95.2 70.9,96.1
Bottom Layer:
  region net F2_POWER: 69,95.15 69.25,94.85 69.25,94.45 69.45,94.25 69.85,94.3 70.1,94.6 70.1,95.5 70.05,95.85
  region net F1_POWER: 66.85,94.45 67.15,94.25 67.3,94.05 67.3,93.75 67.55,93.6 68.05,93.65 68.15,93.95 68.05,94.3 67.85,94.45 67.7,94.7 67.7,95
  region net F0_POWER: 64.4,93.95 64.9,93.5 64.9,92.9 65,92.65 66.05,93.1 65.5,94.25 65.5,94.6
  region net F3_POWER: 62,93.25 62.1,92.9 62.5,91.75 63.7,92.2 63.3,93.65

## Silkscreen, mask and mechanical layers (free items; w line width, h text height)
Top Overlay:
  text "B" at 22.8,142.1 h1.02
  text "A" at 30.4,142.1 h1.02
  text "+" at 25.1,141.85 h1.52
  text "-" at 27.75,141.85 h1.52
  text "-" at 26.45,132 h1.52 r335
  text "A" at 28.6,131.45 h1.02 r335
  text "B" at 30.45,130.6 h1.02 r335
  text "+" at 31.95,129.65 h1.52 r335
  text "B" at 60.7,128.8 h1.02
  text "A" at 68.3,128.8 h1.02
  text "+" at 63,128.55 h1.52
  text "-" at 65.65,128.55 h1.52
  text "SNL-4-0003 REV. A" at 89.05,125.5 h1.52
  text "B" at 98.6,116.05 h1.02
  text "A" at 106.2,116.05 h1.02
  text "+" at 100.9,115.8 h1.52
  text "-" at 103.55,115.8 h1.52
Bottom Overlay:
  text "SNL-5-0003 REV. A" at 114.15,123.15 h1.52
Mechanical 2:
  drawing of 3451 lines, arcs and shapes, not listed
Mechanical 3:
  drawing of 4949 lines, arcs and shapes, not listed
Mechanical 4:
  drawing of 3788 lines, arcs and shapes, not listed
Mechanical 5:
  lines w0.127: 12.45,199.95 50.85,206.3 ; 12.46,199.95 12.46,134.095 19.46,134.095 19.45,130.75 36.46,122.8 36.46,134.095 43.28,134.095 49.173,121.282 52.852,121.282 ; 50.769,206.276 ccw(c50.155,215.756) 55.973,208.245 cw(c64.852,196.782) 78.866,200.504 ccw(c88.048,202.943) 93.865,195.433 cw(c102.745,183.969) 117.245,183.969 117.245,108.469 87.065,108.469 81.173,121.282 76.852,121.282 76.85,95.06 54.05,86.75 52.85,89.75 52.85,121.25
Mechanical 6:
  drawing of 3922 lines, arcs and shapes, not listed
outline:
  lines w0.127: 17.44,134.12 18.454,134.12 cw(c18.454,133.12) 19.454,133.12 19.454,130.62 36.454,122.692 36.454,133.12 cw(c37.454,133.12) 37.454,134.12 42.634,134.12 cw(c42.634,133.12) 43.542,133.537 47.824,124.198 ccw(c52.367,126.287) 51.513,121.361 cw(c51.342,120.375) 52.342,120.375 52.346,107.715 ccw(c77.346,107.715) 53.854,99.165 57.05,90.35 58.55,90.9 59.4,88.7 79.65,96.1 78.9,98.2 80.6,98.8 77.407,107.55 cw(c78.346,107.892) 77.346,107.892 77.346,120.307 ; 17.45,134.12 cw(c17.45,139.12) 12.45,139.12 12.454,209.62 cw(c26.954,209.62) 40.968,213.342 ccw(c50.15,215.781) 55.967,208.27 cw(c64.846,196.807) 78.86,200.529 ccw(c88.042,202.968) 93.86,195.457 cw(c102.739,183.994) 117.239,183.994 117.25,113.37 ; 117.24,113.49 cw(c112.24,113.49) 112.24,108.49 90.26,108.49 cw(c90.26,113.49) 85.717,111.401 81.434,120.725 ; 77.346,120.307 cw(c78.346,120.307) 78.346,121.307 ; 77.346,120.307 cw(c78.346,120.307) 78.346,121.307 ; 78.346,121.307 80.526,121.307 ; 80.526,121.307 cw(c80.526,120.307) 81.434,120.725 ; 80.526,121.307 cw(c80.526,120.307) 81.434,120.725 ; 16.038,208.666 ccw(c16.985,208.345) 16.665,207.398 27.01,203.9 ccw(c27.33,204.847) 28.277,204.527 29.351,207.702 ccw(c28.404,208.022) 28.724,208.969 18.379,212.467 ccw(c18.059,211.52) 17.112,211.84 16.038,208.666
import_curves:
  circle w0.127: c23.14,137.67 r1.018
  circle w0.127: c25.68,137.67 r1.018
  circle w0.127: c28.22,137.67 r1.018
  circle w0.127: c30.76,137.67 r1.018
  circle w0.127: c61.032,124.857 r1.018
  circle w0.127: c63.572,124.857 r1.018
  circle w0.127: c66.112,124.857 r1.018
  circle w0.127: c68.652,124.857 r1.018
  circle w0.127: c98.925,112.045 r1.018
  circle w0.127: c101.465,112.045 r1.018
  circle w0.127: c104.005,112.045 r1.018
  circle w0.127: c106.545,112.045 r1.018
  circle w0.127: c83.789,169.934 r1.25
  circle w0.127: c45.896,182.747 r1.25
  circle w0.127: c102.735,169.975 r1.55
  circle w0.127: c64.842,182.787 r1.55
  circle w0.127: c26.95,195.6 r1.55
  circle w0.127: c26.95,167.6 r1.55
  circle w0.127: c102.735,141.975 r1.55
  circle w0.127: c64.842,154.787 r1.55
  circle w0.127: c45.896,137.747 r1.25
  circle w0.127: c83.789,122.806 r1.25
  lines w0.127: 12.45,139.1 ccw(c17.45,139.1) 17.45,134.1 18.45,134.1 cw(c18.45,133.1) 19.45,133.1 19.45,130.6 36.45,122.673 36.45,133.1 cw(c37.45,133.1) 37.45,134.1 42.63,134.1 cw(c42.63,133.1) 43.538,133.518 47.824,124.198 ccw(c52.367,126.287) 51.513,121.361 cw(c51.342,120.375) 52.342,120.375 52.342,107.696 ccw(c77.342,107.696) 53.85,99.145 57.854,88.145 81.346,96.696 77.403,107.53 cw(c78.342,107.872) 77.342,107.872 77.342,120.287 cw(c78.342,120.287) 78.342,121.287 80.522,121.287 cw(c80.522,120.287) 81.431,120.705 85.717,111.385 ccw(c90.259,113.475) 90.259,108.475 112.235,108.475 ccw(c112.235,113.475) 117.235,113.475 117.235,183.975 ccw(c102.735,183.975) 93.856,195.438 cw(c88.038,202.948) 78.857,200.51 ccw(c64.842,196.787) 55.963,208.251 cw(c50.146,215.761) 40.964,213.322 ccw(c26.95,209.6) 12.45,209.6 12.45,139.1 ; 16.034,208.646 ccw(c16.982,208.326) 16.661,207.378 27.006,203.881 ccw(c27.326,204.828) 28.273,204.508 29.347,207.682 ccw(c28.4,208.002) 28.72,208.95 18.375,212.448 ccw(c18.055,211.5) 17.108,211.821 16.034,208.646 ; 24.322,131.494 24.775,131.283 24.986,131.736 24.533,131.947 24.322,131.494 ; 26.134,130.649 26.587,130.437 26.799,130.891 26.346,131.102 26.134,130.649 ; 27.947,129.804 28.4,129.592 28.611,130.045 28.158,130.257 27.947,129.804 ; 29.759,128.958 30.213,128.747 30.424,129.2 29.971,129.411 29.759,128.958 ; 31.572,128.113 32.025,127.902 32.237,128.355 31.783,128.566 31.572,128.113 ; 33.385,127.268 33.838,127.057 34.049,127.51 33.596,127.721 33.385,127.268
border:
  lines w0.127: -4.746,60.212 0.334,60.212 ; -4.746,120.537 0.334,120.537 ; -4.746,180.862 0.334,180.862 ; 51.804,236.107 51.804,241.187 ; 58.754,-0.113 58.754,4.967 ; 115.304,236.107 115.304,241.187 ; 122.254,-0.113 122.254,4.967 ; 185.754,-0.113 185.754,4.967 ; 185.754,236.107 185.754,241.187 ; 249.254,-0.113 249.254,4.967 ; 249.254,236.107 249.254,241.187 ; 256.874,12.587 371.174,12.587 ; 256.874,20.207 371.174,20.207 ; 256.874,27.827 294.974,27.827 ; 294.974,4.967 294.974,20.207 294.974,35.447 ; 312.754,-0.113 312.754,4.967 ; 312.754,236.107 312.754,241.187 ; 348.314,4.967 348.314,20.207 ; 371.174,60.212 376.254,60.212 ; 371.174,120.537 376.254,120.537 ; 371.174,180.862 376.254,180.862 ; 256.874,4.967 256.874,35.447 ; 256.874,4.967 371.174,4.967 ; 256.874,4.967 221.314,4.967 221.314,35.447 256.874,35.447 ; 256.874,35.447 294.974,35.447 ; 294.974,35.447 371.174,35.447 371.174,4.967 ; 371.174,4.967 0.334,4.967 0.334,236.107 371.174,236.107 371.174,4.967 ; -4.746,-0.113 376.254,-0.113 376.254,241.187 -4.746,241.187 -4.746,-0.113
  text "2" at 82.97,237.885 h1.78
  text "3" at 153.149,237.885 h1.78
  text "4" at 216.818,237.885 h1.78
  text "5" at 280.293,237.885 h1.78
  text "6" at 343.92,237.885 h1.78
  text "1" at 21.3,237.85 h1.78
  text "A" at -2.841,208.853 h1.78
  text "A" at 373.079,208.853 h1.78
  text "B" at -2.841,148.401 h1.78
  text "B" at 373.079,148.401 h1.78
  text "C" at -2.841,88.076 h1.78
  text "C" at 373.079,88.076 h1.78
  text "ENGINEER:" at 258.144,32.907 h1.14
  text "TITLE:" at 296.244,32.907 h1.14
  text "M. Quigley" at 259.134,28.772 h2.54
  text "CONNECTOR BOARD" at 298.534,28.372 h2.54
  text "D" at -2.841,27.878 h1.78
  text "D" at 373.079,27.878 h1.78
  text "PCB DESIGNER:" at 258.144,25.414 h1.14
  text "M. Quigley" at 259.284,21.722 h2.54
  text "Open Source" at 228.934,21.172 h2.29
  text "DATE:" at 258.144,17.667 h1.14
  text "PART NO.:" at 296.244,17.667 h1.14
  text "REV:" at 349.584,17.667 h1.14
  text "Robotics Foundation" at 223.634,16.922 h2.29
  text ".PRINT_DATE" at 259.414,14.619 h1.78
  text "A" at 350.834,13.922 h2.54
  text "FILE NAME:" at 258.144,10.047 h1.14
  text "DWG NO:" at 296.244,10.047 h1.14
  text "SCALE:" at 349.584,10.047 h1.14
  text ".PCB_FILE_NAME_NO_PATH" at 259.414,6.999 h1.78
  text "NONE" at 350.934,6.422 h2.54
  text "1" at 26.53,1.665 h1.78
  text "2" at 89.92,1.665 h1.78
  text "3" at 153.149,1.665 h1.78
  text "4" at 216.818,1.665 h1.78
  text "5" at 280.293,1.665 h1.78
  text "6" at 343.92,1.665 h1.78
Drill Drawing:
  text ".legend" at 263.1,61.15 h1.52
fabrication:
  lines w0.254: 15.302,206.663 15.466,207.143 ; 16.662,205.93 15.384,206.903 ; 16.991,206.891 15.384,206.903 ; 17.305,206.247 15.384,206.903 ; 25.764,203.359 27.684,202.703 ; 26.078,202.715 27.684,202.703 ; 26.406,203.676 27.684,202.703 ; 27.602,202.463 27.766,202.943 ; 28.369,201.586 29.328,202.875 ; 28.533,200.462 29.328,202.875 ; 29.087,202.954 29.57,202.795 ; 29.334,201.268 29.328,202.875 ; 30.809,208.179 31.291,208.021 ; 31.044,209.706 31.05,208.1 ; 31.845,210.512 31.05,208.1 ; 32.009,209.388 31.05,208.1 ; 212.049,213.047 261.579,213.047
  lines w0.356: 186.824,80.844 252.776,80.844 ; 186.824,87.136 252.776,87.136 ; 185.3,54.332 ccw(c187.332,54.332) 187.332,52.3 252.268,52.3 ccw(c252.268,54.332) 254.3,54.332 254.3,92.818 ccw(c252.268,92.818) 252.268,94.85 187.332,94.85 ccw(c187.332,92.818) 185.3,92.818 185.3,54.332
  text "NOTES: (UNLESS OTHERWISE SPECIFIED)" at 212.684,214.317 h1.78
  text "1.  ALL DIMENSIONS ARE IN MILLIMETERS UNLESS OTHERWISE NOTED." at 216.494,207.967 h1.78
  text "12.997" at 17.25,205.3 h1.52 r341.15
  text "2.  FABRICATE PCB IN ACCORDANCE WITH LATEST IPC-6011 AND IPC-6012, CLASS 2." at 216.494,203.522 h1.78
  text "5.502" at 32.542,200.943 h1.52 r71.76
  text "3.  MATERIALS:" at 216.494,199.077 h1.78
  text "LAMINATE MATERIAL MUST BE ABLE TO WITHSTAND A LEAD FREE PROFILE." at 221.574,195.902 h1.78
  text "USE HIGH TEMP FR-4 MATERIAL OR EQUIVALENT." at 221.574,192.727 h1.78
  text "MUST MEET UL 94V-0 FLAMMABILITY RATING." at 221.574,189.552 h1.78
  text "COPPER FOIL TO BE IN ACCORDANCE WITH IPC-MF-150, OUTER LAYER 1.0 OZ FINISHED." at 221.574,186.377 h1.78
  text "OVERALL THICKNESS TO BE .062\" +/- .005." at 221.574,183.202 h1.78
  text "4.  HOLE SIZES IN DRILL CHART ARE FINISHED DIAMETERS, AND IN INCHES." at 216.494,178.507 h1.78
  text "LAYER TO LAYER REGISTRATION SHALL BE WITHIN 0.003" at 221.574,175.332 h1.78
  text "ALL HOLES SHALL BE LOCATED WITHIN 0.003 RADIUS OF TRUE POSITION (RTP)." at 221.574,172.157 h1.78
  text "PLATED-THROUGH HOLES SHALL HAVE A TOLERANCE OF: +0.003/-0.003 FOR HOLE SIZES." at 221.574,168.982 h1.78
  text "5.  ALL PLATED-THROUGH HOLES AND CONDUCTIVE SURFACES SHALL BE PLATED WITH" at 216.494,164.537 h1.78
  text "A MINIMUM THICKNESS OF 0.001 COPPER." at 221.574,161.362 h1.78
  text "6.  FINISH:" at 216.494,156.917 h1.78
  text "SURFACE FINISH TO BE ELECTROLESS NICKEL/IMMERSION GOLD PER IPC-4552." at 221.574,153.742 h1.78
  text "NICKEL THICKNESS 120-240 MICROINCHES, GOLD THICKNESS 2.0-8.0 MICROINCHES." at 221.574,150.567 h1.78
  text "7.  SOLDER MASK:" at 216.494,146.122 h1.78
  text "BLACK LIQUID PHOTOIMAGEABLE (LPI) SOLDERMASK SHALL BE APPLIED PER" at 221.324,142.797 h1.78
  text "LATEST PC-SM-840, CLASS H, OVER BARE COPPER (SMOBC) TO BOTH SIDES OF THE BOARD." at 221.324,139.622 h1.78
  text "8.  SILKSCREEN:" at 216.044,132.327 h1.78
  text "SHALL BE APPLIED WITH WHITE NON-CONDUCTIVE PERMANENT EPOXY INK." at 221.124,129.152 h1.78
  text "THERE SHALL BE NO SILKSCREEN ON ANY SOLDERABLE COMPONENT PAD." at 221.124,125.977 h1.78
  text "9.  TOLERANCES:" at 216.044,121.532 h1.78
  text "BOW AND TWIST OF THE BOARD SHALL NOT EXCEED 0.75%." at 221.124,118.357 h1.78
  text "CONDUCTOR WIDTHS AND SPACING SHALL BE WITHIN +/-0.002 OF GERBER DATA." at 221.124,115.182 h1.78
  text "REMOVE ALL BURRS AND BREAK SHARP EDGES 0.012 MAX." at 221.124,112.007 h1.78
  text "10.  PLEASE NOTE THE INTERIOR CUTOUT IN THE UPPER LEFT OF THE PCB." at 216.144,106.982 h1.78
  text "11.  THE FRONT SIDE OF THE PCB HAS THREE GROUPS OF FOUR GOLD PADS. THESE ARE" at 215.794,102.482 h1.78
  text "POGO PIN TARGETS. PLEASE DO NOT APPLY SOLDER TO THEM." at 222.124,98.957 h1.78
  text "Layer Stack Up Detail for: conn.PcbDoc" at 186.824,89.809 h1.7
  text "Layer" at 186.824,84.787 h1.45
  text "Gerber" at 213.731,84.787 h1.45
  text "Copper" at 232.813,84.787 h1.45
  text "Name" at 186.824,81.891 h1.45
  text "Document" at 213.731,81.891 h1.45
  text "Thickness" at 232.813,81.891 h1.45
  text "Top Layer" at 186.824,76.3 h2.03
  text "(.GTL)" at 213.731,76.3 h2.03
  text "1.4mil" at 232.813,76.3 h2.03
  text "Mid-Layer 1" at 186.824,70.479 h2.03
  text "(.G1)" at 213.731,70.479 h2.03
  text "0.7mil" at 232.813,70.479 h2.03
  text "Mid-Layer 2" at 186.824,64.657 h2.03
  text "(.G2)" at 213.731,64.657 h2.03
  text "0.7mil" at 232.813,64.657 h2.03
  text "Bottom Layer" at 186.824,58.835 h2.03
  text "(.GBL)" at 213.731,58.835 h2.03
  text "1.4mil" at 232.813,58.835 h2.03
  text "Fabrication Drawing" at 298.584,23.522 h2.54
  text "SNL-5-0003" at 298.084,13.772 h2.54
  text "SNL-5-0003-FAB" at 298.3,6.4 h2.54
assembly:
  lines w0.254: 212.049,212.847 261.579,212.847
  text "NOTES: (UNLESS OTHERWISE SPECIFIED)" at 212.684,214.117 h1.78
  text "1.  ASSEMBLE BOARD PER IPC-A-610, CLASS 2 MINIMUM USING A LEAD-FREE (ROHS) PROCESS" at 216.494,207.767 h1.78
  text "2.  INDIVIDUALLY PLACE PCA IN ANTI-STATIC BAG PER EIA-525. PROTECT IN SHIPPING" at 216.494,203.322 h1.78
  text "CONTAINER TO PREVENT DAMAGE UNDER NORMAL TRANSPORT AND HANDLING." at 221.374,200.302 h1.78
  text "3.  MATERIAL REQUIREMENTS ARE SPECIFIED ON A SEPARATE BOM. ALTERNATE" at 216.594,195.627 h1.78
  text "MATERIAL SHALL NOT BE USED UNLESS APPROVED IN WRITING." at 221.674,192.452 h1.78
  text "4.  TOP-SIDE HEADER J2 EXTENDS BEYOND THE OUTLINE OF THE PCB. THIS IS BY DESIGN." at 216.794,188.177 h1.78
  text "5.  THE FRONT SIDE OF THE PCBA HAS THREE GROUPS OF FOUR GOLD PADS. THESE ARE" at 216.694,183.982 h1.78
  text "POGO PIN TARGETS. PLEASE DO NOT APPLY SOLDER TO THEM." at 221.85,180.55 h1.78
  text "Assembly Drawing" at 298.584,23.322 h2.54
  text "SNL-4-0003" at 297.984,13.772 h2.54
  text "SNL-4-0003-ASY" at 298.284,6.372 h2.54

## Dimensions
18.059,211.52 to 20.05,214.25 on border
88.042,202.968 to 84.65,196.95 on border
102.739,183.994 to 117.6,193.55 on border
60.6,88.7 to 79.672,96.04 on border
12.35,137 to 36.4,120.9 on border